# Altium PCB PCB1_MB.PcbDoc
Units mm, origin at the board's own origin, x right, y up, seen from the top; angles counter-clockwise.
Board outline 130 x 98.75 mm, 2 copper layers (Top Layer, Bottom Layer); 30 components, 51 nets, 191 pads, 0 vias.
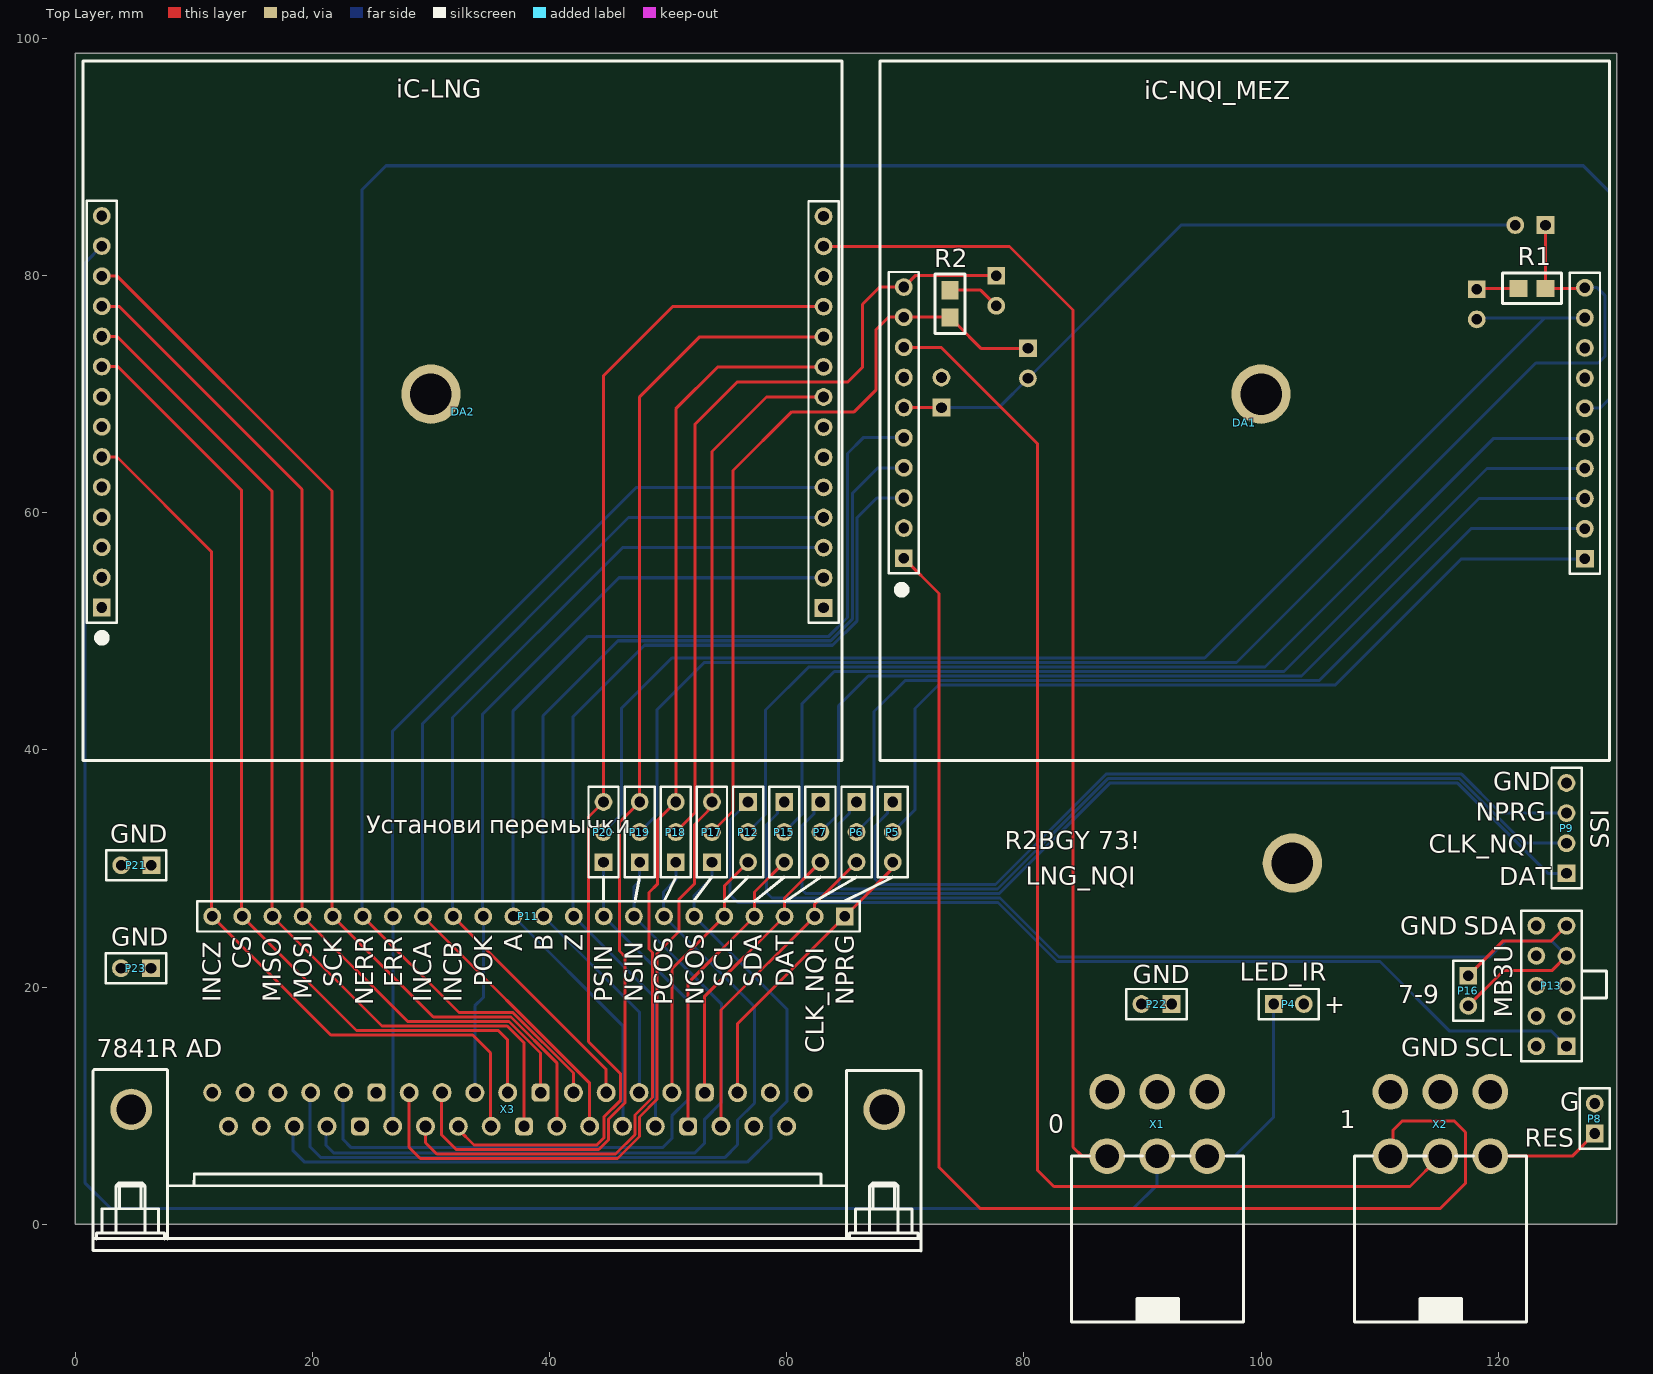
[diagram p0: Top Layer view]
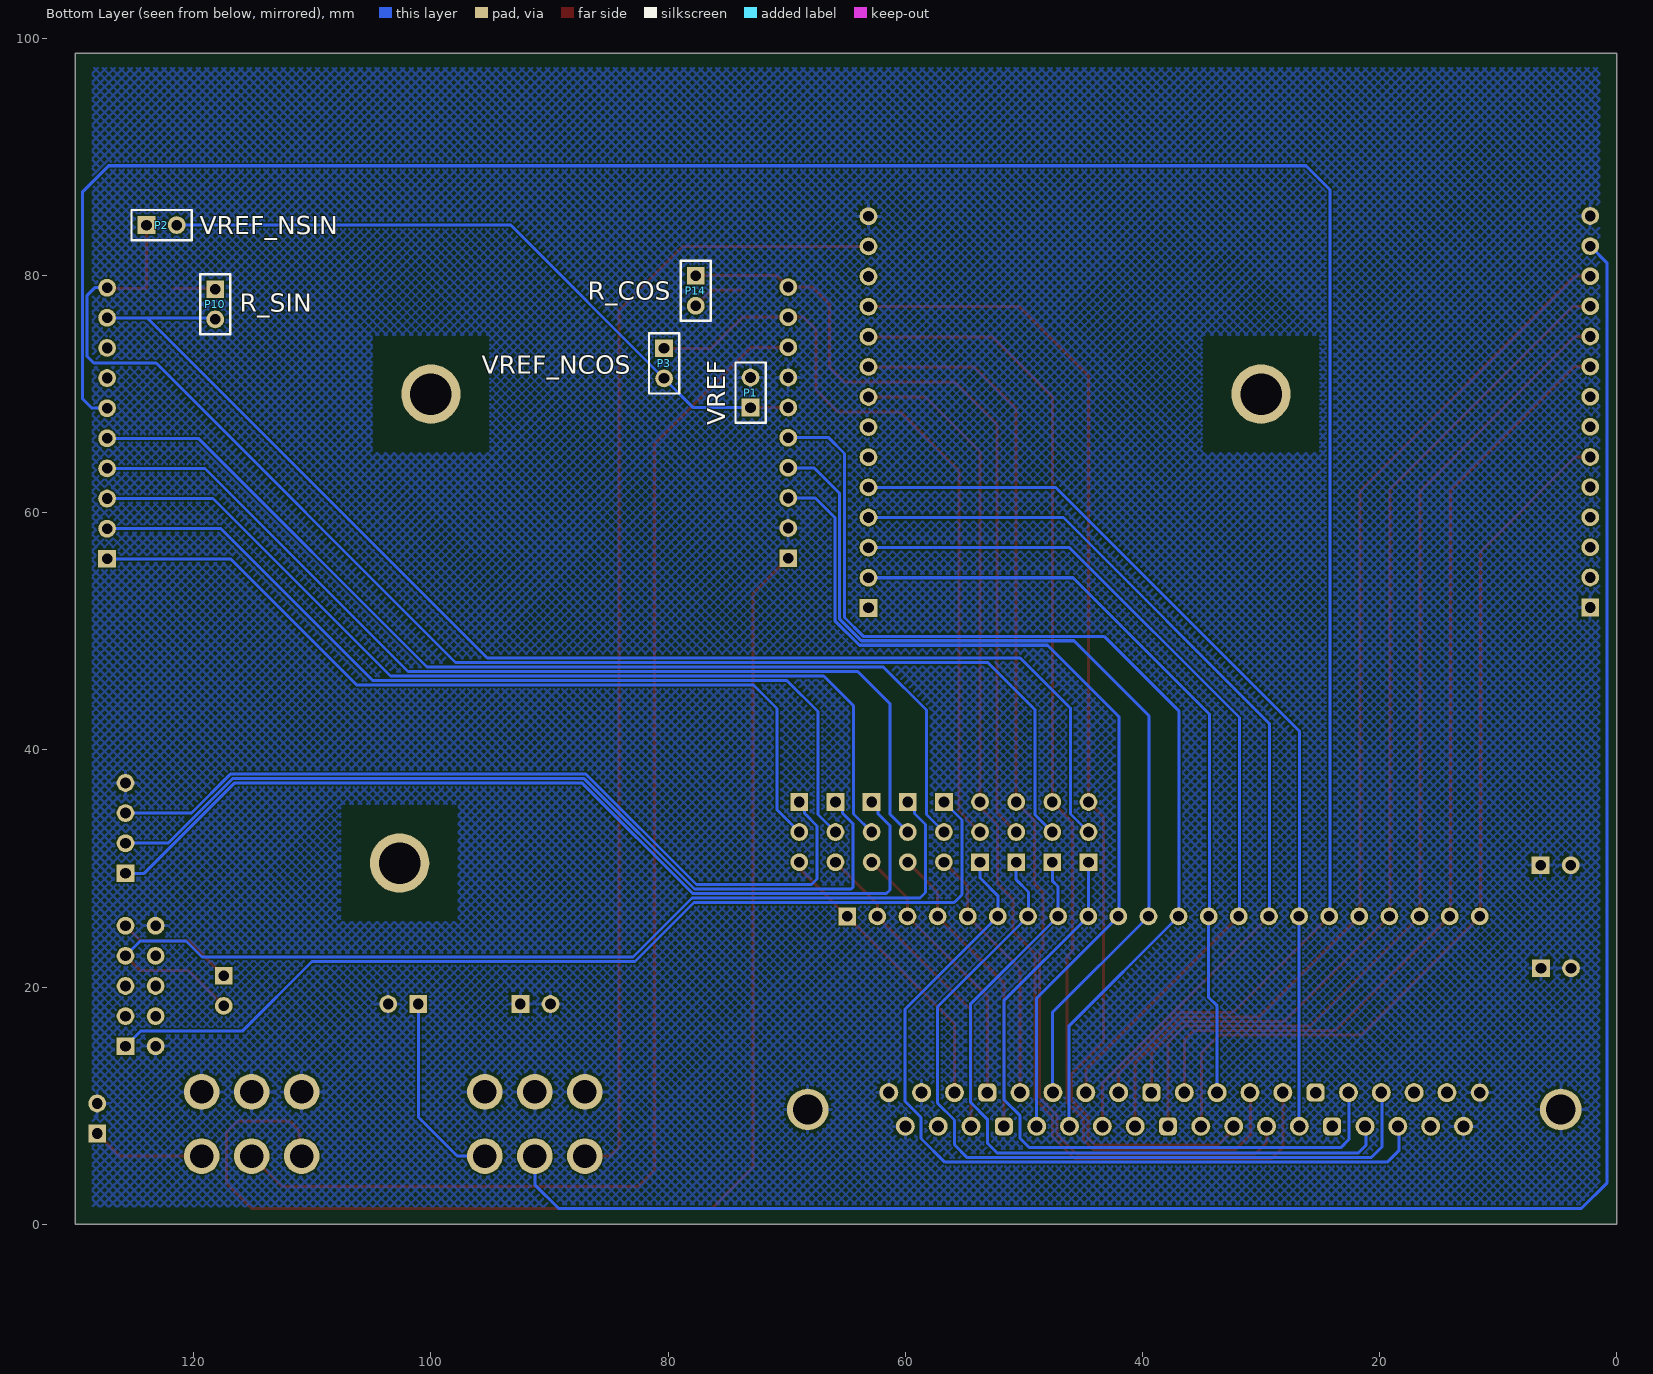
[diagram p1: Bottom Layer view, seen from below]

## Layer stack, top to bottom
Top Solder: solder mask 0.0102, Solder Resist, Dk 3.5
Top Layer: signal copper 0.0356
Dielectric 1: dielectric 0.32, FR-4, Dk 4.8
Bottom Layer: signal copper 0.0356
Bottom Solder: solder mask 0.0102, Solder Resist, Dk 3.5

## Board outline
0,0 0,98.75 130,98.75 130,0

## Design rules (kind name [scope] priority, off if disabled: settings)
Clearance [All] p1: gap=0.125 ignorepadtopadclearanceinfootprint=FALSE
PolygonConnect [All] p1: connectstyle=Relief reliefconductorwidth=0.254 reliefentries=4 polygonreliefangle="90 Angle" airgapwidth=0.254
RoutingVias [All] p1: holewidth=0.711 width=1.27 viastyle="Through Hole" minholewidth=0.711 minwidth=1.27 maxholewidth=0.711 maxwidth=1.27
SolderMaskExpansion [All] p1: expansion=0.102 istentingtop=FALSE
Width [All] p1: maxlimit=0.254 minlimit=0.125 preferedwidth=0.254
30 further rules are at their usual default settings.

## Components (designator, comment, footprint, x,y, rotation, side; value= is the part's Value field where it differs from the comment)
DA1 "iC-NQI_MEZ" iC-NQI_MEZ 69.877,56.165 r0 top
DA2 "iC-LNG" iC_LNG_MEZON 2.25,52 r0 top
P1 "VREF" HDR1X2 73.05,68.859 r90 bottom
P2 "VREF_NSIN" HDR1X2 123.977,84.252 r180 bottom
P3 "VREF_NCOS" HDR1X2 80.34,73.863 r270 bottom
P4 "LED_IR" HDR1X2 101.067,18.567 r0 top
P5 "NPRG" HDR1X3 68.936,35.611 r270 top
P6 "CLK_NQI" HDR1X3 65.888,35.611 r270 top
P7 "DAT" HDR1X3 62.84,35.611 r270 top
P8 "RES" HDR1X2 128.143,7.645 r90 top
P9 "SSI" HDR1X4 125.755,29.591 r90 top
P10 "R_SIN" HDR1X2 118.186,78.842 r270 bottom
P11 "Header 22" HDR1X22 64.897,25.959 r180 top
P12 "SCL" HDR1X3 56.744,35.611 r270 top
P13 "MB3U" HDR2X5 125.755,15.011 r90 top
P14 "R_COS" HDR1X2 77.673,79.985 r270 bottom
P15 "SDA" HDR1X3 59.792,35.611 r270 top
P16 "7-9" HDR1X2 117.475,20.955 r270 top
P17 "NCOS" HDR1X3 53.696,30.531 r90 top
P18 "PCOS" HDR1X3 50.648,30.531 r90 top
P19 "NSIN" HDR1X3 47.6,30.531 r90 top
P20 "PSIN" HDR1X3 44.552,30.531 r90 top
P21 "GND" HDR1X2 6.426,30.277 r180 top
P22 "GND" HDR1X2 92.456,18.567 r180 top
P23 "GND" HDR1X2 6.401,21.59 r180 top
R1 "120" RES 120.371,80.162 r270 top
R2 "120" RES 72.517,75.133 r0 top
X1 "0" POWER 87.022,5.742 r180 top
X2 "1" POWER 110.898,5.742 r180 top
X3 "7841R AD" CHEAP_CONN_FEMALE 68.226,9.679 r180 top

## Footprints (in the part's own frame and the unit in brackets; to place one, negate y for a bottom-side part, rotate by r counter-clockwise, add the part's x,y. Pads: shape width x height; smd on the part's side, far side on the other; paste and mask are expansions set on the pad)
CHEAP_CONN_FEMALE [mm] "CHEAP_CONN_FEMALE"
  round 1.6 hole 1: 1(6.833,-1.422) 2(9.601,-1.422) 3(12.37,-1.422) 5(17.907,-1.422) 6(20.676,-1.422) 7(23.444,-1.422) 8(26.213,-1.422) 10(31.75,-1.422) 11(34.519,-1.422) 12(37.287,-1.422) 13(40.056,-1.422) 15(45.593,-1.422) 16(48.362,-1.422) 17(51.13,-1.422) 18(53.899,-1.422) 20(8.23,1.422) 21(10.998,1.422) 22(13.767,1.422) 24(19.304,1.422) 25(22.073,1.422) 26(24.841,1.422) 27(27.61,1.422) 29(33.147,1.422) 30(35.916,1.422) 31(38.684,1.422) 32(41.453,1.422) 34(46.99,1.422) 35(49.759,1.422) 36(52.527,1.422) 37(55.296,1.422)
  rrect50% 1.524x1.524 hole 0.965: 4(15.138,-1.422) 9(28.981,-1.422) 14(42.824,-1.422) 23(16.535,1.422) 28(30.378,1.422) 33(44.221,1.422)
  round 1.524 hole 0.965: 19(56.667,-1.422)
  round 3.5 hole 2.5: 38(0,0) 39(63.5,0)
  silkscreen extent -3.11,-3.36 66.72,11.92
HDR1X2 [mm] "Connector; Header; 2 Position"
  rect 1.5x1.5 hole 0.9: 1(0,0)
  round 1.5 hole 0.9: 2(2.54,0)
  silkscreen extent -1.27,-1.27 3.81,1.27
HDR1X3 [mm] "Connector; Header; 3 Position"
  rect 1.5x1.5 hole 0.9: 1(0,0)
  round 1.5 hole 0.9: 2(2.54,0) 3(5.08,0)
  silkscreen extent -1.27,-1.27 6.35,1.27
HDR1X4 [mm] "Connector; Header; 4 Position"
  rect 1.5x1.5 hole 0.9: 1(0,0)
  round 1.5 hole 0.9: 2(2.54,0) 3(5.08,0) 4(7.62,0)
  silkscreen extent -1.27,-1.27 8.89,1.27
HDR1X22 [mm] "Connector; Header; 22 Position"
  rect 1.5x1.5 hole 0.9: 1(0,0)
  round 1.5 hole 0.9: 2(2.54,0) 3(5.08,0) 4(7.62,0) 5(10.16,0) 6(12.7,0) 7(15.24,0) 8(17.78,0) 9(20.32,0) 10(22.86,0) 11(25.4,0) 12(27.94,0) 13(30.48,0) 14(33.02,0) 15(35.56,0) 16(38.1,0) 17(40.64,0) 18(43.18,0) 19(45.72,0) 20(48.26,0) 21(50.8,0) 22(53.34,0)
  silkscreen extent -1.27,-1.27 54.61,1.27
HDR2X5 [mm] "Connector; Header; 5x2 Position"
  rect 1.5x1.5 hole 0.9: 1(0,0)
  round 1.5 hole 0.9: 2(0,2.54) 3(2.54,0) 4(2.54,2.54) 5(5.08,0) 6(5.08,2.54) 7(7.62,0) 8(7.62,2.54) 9(10.16,0) 10(10.16,2.54)
  silkscreen extent -1.27,-1.27 11.43,3.81
iC-NQI_MEZ [mm]
  rect 1.5x1.5 hole 0.9: 1(0,0) 20(57.429,-0.051)
  round 1.5 hole 0.9: 2(0,2.54) 3(0,5.08) 4(0,7.62) 5(0,10.16) 6(0,12.7) 7(0,15.24) 8(0,17.78) 9(0,20.32) 10(0,22.86) 11(57.429,22.809) 12(57.429,20.269) 13(57.429,17.729) 14(57.429,15.189) 15(57.429,12.649) 16(57.429,10.109) 17(57.429,7.569) 18(57.429,5.029) 19(57.429,2.489)
  silkscreen extent -2.01,-17.08 59.49,41.92
iC_LNG_MEZON [mm]
  rect 1.5x1.5 hole 0.9: 1(0,0) 28(60.858,-0.025)
  round 1.5 hole 0.9: 2(0,2.54) 3(0,5.08) 4(0,7.62) 5(0,10.16) 6(0,12.7) 7(0,15.24) 8(0,17.78) 9(0,20.32) 10(0,22.86) 11(0,25.4) 12(0,27.94) 13(0,30.48) 14(0,33.02) 15(60.858,32.995) 16(60.858,30.455) 17(60.858,27.915) 18(60.858,25.375) 19(60.858,22.835) 20(60.858,20.295) 21(60.858,17.755) 22(60.858,15.215) 23(60.858,12.675) 24(60.858,10.135) 25(60.858,7.595) 26(60.858,5.055) 27(60.858,2.515)
  silkscreen extent -1.57,-12.91 62.43,46.09
POWER [mm] "POWER"
  round 3 hole 2: 1(0,0) 2(-4.217,0) 3(-8.435,0) 4(0,-5.422) 5(-4.217,-5.422) 6(-8.435,-5.422)
  silkscreen extent -11.5,0 3,14
RES [mil] "FROM_MAX"
  rect 55.98x60 smd: 1(49,52.71) 2(49,142.71)
  silkscreen extent -1,0 99,196, body extent 17,19 81,177, height 100

## Part data
DA1: "Оптический энкодер"
DA2: library part iC-LNG_MEZ, "Оптический энкодер"
P1 P2 P3 P4 P8 P10 P14 P16 P21 P22 P23: library part "Header 2", "Header, 2-Pin", LatestRevisionDate=17-Jul-2002, LatestRevisionNote="Re-released for DXP Platform.", Publisher="Altium Limited"
P5 P6 P7 P12 P15 P17 P18 P19 P20: library part "Header 3", "Header, 3-Pin", LatestRevisionDate=17-Jul-2002, LatestRevisionNote="Re-released for DXP Platform.", Publisher="Altium Limited"
P9: library part "Header 4", "Header, 4-Pin", LatestRevisionDate=17-Jul-2002, LatestRevisionNote="Re-released for DXP Platform.", Publisher="Altium Limited"
P11: "Header, 22-Pin", LatestRevisionDate=17-Jul-2002, LatestRevisionNote="Re-released for DXP Platform.", Publisher="Altium Limited"
P13: library part "Header 5X2", "Header, 5-Pin, Dual row", LatestRevisionDate=17-Jul-2002, LatestRevisionNote="Re-released for DXP Platform.", Publisher="Altium Limited"
R1 R2: library part RES
X1 X2: library part POWER
X3: library part CHEAP_CON_37_FEM_7841R_AD

## Free pads (board coordinates)
  round 5 hole 3.5: 0(30,70) 0(100,70) 0(102.641,30.455)

## Nets (pads, with @x,y where several pads share a name; then routed paths per layer and width w, separated by ;. In a path a pad name is that pad's centre, name@x,y a point inside that pad or via, vN(x,y) a via of type N, cw(c..) or ccw(c..) an arc to the next point about the centre after c; other vN are vias at no path point)
A: DA1.5 P11.12 X3.25 | length 89.5
  Bottom Layer w0.254: X3.25@46.177,8.257 46.177,16.739 P11.12 36.906,26.01 36.906,43.256 43.231,49.581 63.551,49.581 65.126,51.156 65.126,64.999 66.452,66.325 DA1.5
B: DA1.4 P11.11 X3.6 | length 80.4
  Bottom Layer w0.254: X3.6@47.6,11.101 47.6,17.856 P11.11 39.446,26.01 39.446,42.875 45.773,49.202 63.708,49.202 65.532,51.026 65.532,61.62 67.697,63.785 DA1.4
CLK_NQI: DA1.19 P6.2 | length 77.1
  Bottom Layer w0.254: P6.2 67.361,34.544 67.361,43.231 69.987,45.857 73.838,45.857 104.912,45.857 117.709,58.654 DA1.19
CLK_NQI_1: P6.3 P11.2 X3.22 | length 27.3
  Top Layer w0.254: X3.22@54.459,8.097 54.459,18.061 P11.2 62.357,27 P6.3
  Bottom Layer w0.254: P11.2 P11.2@62.385,25.987 ; P6.3@65.888,30.443 P6.3
CS: DA2.9 P11.21 X3.10 | length 83.2
  Top Layer w0.254: DA2.9 3.601,72.32 14.046,61.874 14.046,26.01 P11.21 23.716,16.34 35.679,16.34 36.474,15.545 X3.10@36.474,11.101
DAT: DA1.18 P7.2 | length 81.5
  Bottom Layer w0.254: P7.2 64.364,34.595 64.364,43.713 66.886,46.236 73.838,46.236 103.411,46.236 118.37,61.194 DA1.18
DAT_1: P7.3 P11.3 X3.4 | length 23.7
  Top Layer w0.254: X3.4@53.088,10.902 53.088,19.229 P11.3 59.817,27.508 P7.3
ERR: DA2.24 P11.16 X3.32 | length 78.2
  Bottom Layer w0.254: X3.32@26.797,8.257 P11.16 26.746,26.01 26.746,41.554 47.326,62.135 DA2.24
GND: DA1.2 DA1.7 DA2.1 DA2.14 DA2.15 P1.2 P4.2 P8.2 P9.4 P13.2 P13.10 P21.1 P21.2 P22.1 P22.2 P23.1 P23.2 X1.4 X1.5 X1.6 X2.4 X2.5 X2.6 X3.1 X3.2 X3.19 X3.20 X3.37 X3.38 X3.39
INCA: DA2.25 P11.15 X3.26 | length 81
  Top Layer w0.254: P11.15 43.358,11.938 X3.26@43.358,8.052
  Bottom Layer w0.254: P11.15 29.286,26.01 29.286,42.215 46.666,59.595 DA2.25
INCB: DA2.26 P11.14 X3.7 | length 74.3
  Top Layer w0.254: P11.14 44.782,13.054 X3.7@44.782,10.992
  Bottom Layer w0.254: P11.14 31.826,26.01 31.826,42.723 46.158,57.055 DA2.26
INCZ: DA2.6 P11.22 X3.29 | length 77.8
  Top Layer w0.254: DA2.6 3.524,64.7 11.506,56.718 11.506,26.01 P11.22 21.555,15.961 33.518,15.961 35.027,14.453 X3.29@35.027,8.257
LED_IR: P4.1 X1.3 | length 16.5
  Bottom Layer w0.254: X1.3 97.766,5.742 101.067,9.042 P4.1
MISO: DA2.10 P11.20 X3.28 | length 88.4
  Top Layer w0.254: DA2.10 3.55,74.86 16.586,61.824 16.586,26.01 P11.20 25.877,16.719 36.433,16.719 37.848,15.304 X3.28@37.848,8.138
MOSI: DA2.11 P11.19 X3.9 | length 87.6
  Top Layer w0.254: DA2.11 3.702,77.4 19.126,61.976 19.126,26.01 P11.19 28.038,17.098 36.59,17.098 39.245,14.443 X3.9@39.245,10.965
NCOS: DA2.21 P17.3 X3.13 | length 96.8
  Top Layer w0.254: X3.13 28.143,11.074 28.143,6.502 29.102,5.543 45.729,5.543 47.584,7.399 47.584,9.05 49.071,10.536 49.071,22.833 50.927,24.689 50.927,27.407 52.222,28.702 52.222,33.706 53.366,34.849 53.366,34.944 53.696,35.274 P17.3 53.696,65.151 58.299,69.755 DA2.21
NCOS_NQI: DA1.9 P3.1 P17.2 R2.1 | length 65.5
  Top Layer w0.254: P17.2 55.474,34.849 55.474,63.551 60.427,68.504 65.684,68.504 67.513,70.333 67.513,75.413 68.586,76.485 DA1.9 73.749,76.485 73.749,76.434 74.346,75.837 74.397,75.837 76.37,73.863 P3.1
NCOS_NQI_1: P11.6 P17.1 X3.35 | length 71.3
  Bottom Layer w0.254: X3.35@18.39,8.257 18.39,6.198 19.351,5.236 56.671,5.236 58.674,7.239 58.674,9.017 60.02,10.363 60.02,18.136 P11.6 52.197,27.711 53.696,29.21 P17.1
NERR: DA1.15 P11.17 X3.8 | length 213
  Top Layer w0.254: P11.17 32.36,17.856 36.904,17.856 42.013,12.747 X3.8@42.013,11.032
  Bottom Layer w0.254: P11.17 24.206,26.01 24.206,87.249 26.213,89.256 127.178,89.256 129.362,87.071 129.362,69.596 128.58,68.814 DA1.15
NetP5_1: P5.1 P9.3 | length 70.8
  Bottom Layer w0.254: P5.1 68.487,35.162 68.487,34.629 67.437,33.579 67.437,29.108 67.902,28.643 77.614,28.643 86.919,37.948 116.916,37.948 120.193,34.671 P9.3@125.679,34.671
NetP6_1: P6.1 P9.2 | length 75.2
  Bottom Layer w0.254: P6.1 65.3,35.023 65.3,34.668 64.414,33.782 64.414,28.413 64.563,28.264 77.771,28.264 87.076,37.569 116.736,37.569 122.174,32.131 P9.2@125.679,32.131
NetP7_1: P7.1 P9.1 | length 79.6
  Bottom Layer w0.254: P7.1 62.315,35.086 62.315,34.629 61.29,33.604 61.29,28.194 61.599,27.885 77.928,27.885 87.233,37.19 116.579,37.19 124.178,29.591 P9.1@125.679,29.591
NetP10_1: P10.1 R1.1 | length 3.6
  Top Layer w0.254: P10.1 118.262,78.918 R1.1
NetP12_1: P12.1 P13.1 | length 84.3
  Bottom Layer w0.254: P12.1 55.22,34.087 55.22,27.788 55.88,27.127 77.823,27.127 82.799,22.151 110.031,22.151 115.9,16.281 124.485,16.281 P13.1
NetP13_7: P13.7 P15.1 P16.2 | length 89.1
  Top Layer w0.254: P16.2 120.447,21.387 124.511,21.387 P13.7
  Bottom Layer w0.254: P15.1 59.229,35.049 59.229,34.642 58.293,33.706 58.293,27.965 58.752,27.506 77.98,27.506 82.956,22.53 119.304,22.53 120.65,23.876 124.511,23.876 P13.7
NetP13_9: P13.9 P16.1 | length 10
  Top Layer w0.254: P16.1 120.421,23.901 124.485,23.901 P13.9
NetP14_2: P14.2 R2.2 | length 4.5
  Top Layer w0.254: R2.2 76.36,78.758 P14.2
NPRG: DA1.20 P5.2 | length 72.9
  Bottom Layer w0.254: P5.2 70.815,34.95 70.815,43.485 72.808,45.478 73.838,45.478 106.26,45.478 116.896,56.114 DA1.20
NPRG_1: P5.3 P11.1 X3.3 | length 25.1
  Top Layer w0.254: X3.3@55.856,10.885 55.856,16.918 P11.1 68.697,29.759 68.697,30.292 P5.3
NSIN: DA2.19 P19.3 X3.12 | length 100.2
  Top Layer w0.254: X3.12@30.886,11.101 30.886,7.544 32.129,6.301 44.15,6.301 44.958,7.109 44.958,8.839 46.38,10.262 46.38,22.555 45.898,23.038 45.898,33.909 P19.3 47.6,69.774 52.66,74.835 DA2.19
NSIN_NQI: DA1.11 P2.1 P19.2 R1.2 | length 119
  Top Layer w0.254: P2.1 123.977,78.936 R1.2 127.25,78.918 DA1.11
  Bottom Layer w0.254: P19.2 49.073,34.544 49.073,43.409 53.037,47.373 73.838,47.373 97.919,47.373 123.165,72.619 128.422,72.619 128.983,73.179 128.983,78.332 128.341,78.974 DA1.11
NSIN_NQI_1: P11.8 P19.1 X3.34 | length 61.7
  Bottom Layer w0.254: X3.34@21.158,8.257 21.158,6.655 21.819,5.994 52.222,5.994 53.086,6.858 53.086,8.865 54.483,10.262 54.483,18.593 P11.8 47.117,28.473 47.6,28.956 P19.1
PCOS: DA2.20 P18.3 X3.31 | length 96.9
  Top Layer w0.254: X3.31 29.542,6.882 30.501,5.922 45.572,5.922 47.205,7.556 47.205,9.207 48.692,10.693 48.692,22.911 48.387,23.216 48.387,27.965 49.124,28.702 49.124,34.087 P18.3 50.648,68.758 54.184,72.295 DA2.20
PCOS_NQI: DA1.10 P14.1 P18.2 | length 68.8
  Top Layer w0.254: P18.2 52.273,34.696 52.273,67.462 55.829,71.018 65.151,71.018 66.396,72.263 66.396,77.572 67.849,79.025 DA1.10 70.837,79.985 P14.1
PCOS_NQI_1: P11.7 P18.1 X3.16 | length 69.5
  Bottom Layer w0.254: X3.16@19.812,11.101 19.812,6.528 20.724,5.615 54.764,5.615 55.855,6.706 55.855,8.788 57.277,10.211 57.277,18.339 P11.7 49.606,26.01 49.606,28.016 50.648,29.058 P18.1
POK: DA2.27 P11.13 X3.11 | length 65.7
  Bottom Layer w0.254: X3.11@33.706,11.101 33.706,18.415 34.417,19.126 P11.13 34.366,26.01 34.366,43.028 45.853,54.515 DA2.27
PSIN: DA2.18 P20.3 X3.30 | length 100.8
  Top Layer w0.254: X3.30 32.31,7.999 33.63,6.68 43.993,6.68 44.577,7.264 44.577,9.042 46.001,10.467 46.001,12.673 43.282,15.392 43.282,34.341 P20.3 44.552,71.552 50.374,77.375 DA2.18
PSIN_NQI: DA1.12 P10.2 P20.2 | length 111.7
  Bottom Layer w0.254: P20.2 46.076,34.595 46.076,43.51 50.317,47.752 73.838,47.752 95.25,47.752 123.932,76.434 ; P10.2 118.319,76.434 123.932,76.434 ; DA1.12 123.932,76.434
PSIN_NQI_1: P11.9 P20.1 X3.15 | length 59.1
  Bottom Layer w0.254: X3.15@22.606,11.101 22.606,7.137 23.292,6.452 49.53,6.452 50.317,7.239 50.317,9.144 51.689,10.516 51.689,18.847 P11.9 44.552,25.984 P20.1
RESERVE: P8.1 X2.3 | length 9.6
  Top Layer w0.254: X2.3 126.24,5.742 P8.1
SCK: DA2.12 P11.18 X3.27 | length 92.3
  Top Layer w0.254: DA2.12 3.55,79.94 21.666,61.824 21.666,26.01 P11.18 30.199,17.477 36.747,17.477 40.616,13.608 X3.27@40.616,8.139
SCL: DA1.16 P12.2 | length 89.5
  Bottom Layer w0.254: P12.2 58.217,34.544 58.217,43.358 61.853,46.994 73.838,46.994 100.334,46.994 119.614,66.274 DA1.16
SCL_1: P11.5 P12.3 X3.5 | length 22.2
  Top Layer w0.254: X3.5@50.319,11.01 50.319,21.541 P11.5 54.737,28.524 P12.3
SDA: DA1.17 P15.2 | length 85.7
  Bottom Layer w0.254: P15.2 61.29,34.569 61.29,43.891 64.014,46.615 73.838,46.615 101.936,46.615 119.055,63.734 DA1.17
SDA_1: P11.4 P15.3 X3.23 | length 26
  Top Layer w0.254: X3.23@51.691,7.97 51.691,20.372 P11.4 57.277,28.016 P15.3
  Bottom Layer w0.254: P15.3@59.724,30.463 P15.3
VDD_LNG: DA2.13 X1.2 | length 174.1
  Bottom Layer w0.254: DA2.13 0.813,81.043 0.813,3.505 2.997,1.321 89.23,1.321 91.24,3.33 X1.2
VDD_NQI: DA1.1 X2.1 | length 112.7
  Top Layer w0.254: DA1.1 72.847,53.195 72.847,4.801 76.302,1.346 115.138,1.346 117.246,3.454 117.246,7.747 116.307,8.687 111.887,8.687 111.106,7.906 111.106,5.95 X2.1
VDDA_LNG: DA2.16 X1.1 | length 97
  Top Layer w0.254: DA2.16 78.785,82.455 84.15,77.089 84.15,6.502 84.911,5.742 X1.1
VDDA_NQI: DA1.8 X2.2 | length 111.5
  Top Layer w0.254: DA1.8 73.019,73.945 81.128,65.837 81.128,4.572 82.525,3.175 112.548,3.175 X2.2
VREF_NQI: DA1.6 P1.1 P2.2 P3.2 | length 57.9
  Top Layer w0.254: DA1.6 73.045,68.865 P1.1
  Bottom Layer w0.254: P1.1 77.876,68.859 P3.2 93.269,84.252 P2.2
Z: DA1.3 P11.10 X3.24 | length 78
  Bottom Layer w0.254: X3.24@48.92,8.257 48.92,19.075 P11.10 41.986,26.01 41.986,42.799 48.01,48.823 63.865,48.823 65.938,50.896 65.938,59.588 67.595,61.245 DA1.3
pads on no net: DA1.13 DA1.14 DA2.2 DA2.3 DA2.4 DA2.5 DA2.7 DA2.8 DA2.17 DA2.22 DA2.23 DA2.28 P13.3 P13.4 P13.5 P13.6 P13.8 X3.14 X3.17 X3.18 X3.21 X3.33 X3.36

## Polygon pours and split planes (outlines as drawn)
GND on Bottom Layer "Top Overlay-No Net" (hatched 45Degree grid 0.508 track 0.203, remove dead copper, pour order 0): 1.5,97.5 1.5,1.5 128.5,1.5 128.5,97.5

## Other copper
Bottom Layer:
  pour cut-out: 97.641,35.455 107.641,35.455 107.641,25.455 97.641,25.455
  pour cut-out: 95,75 105,75 105,65 95,65
  pour cut-out: 25,75 35,75 35,65 25,65

## Silkscreen, mask and mechanical layers (free items; w line width, h text height)
Top Overlay:
  lines w0.254: 44.552,27.28 44.552,29.261 ; 47.193,27.229 47.6,29.261 ; 49.708,27.305 50.648,29.261 ; 52.222,27.305 53.696,29.261 ; 54.712,27.229 56.744,29.261 ; 57.277,27.229 59.792,29.261 ; 59.868,27.203 62.84,29.261 ; 62.382,27.229 65.888,29.261 ; 64.897,27.254 68.936,29.261 ; 127.051,19.075 129.108,19.075 129.108,21.361 127.076,21.361
  text "GND" at 119.584,36.602 h1.52
  text "NPRG" at 118.086,34.011 h1.52
  text "Установи перемычки" at 24.544,32.457 h2.52
  text "R2BGY 73!" at 78.406,31.611 h1.52
  text "CLK_NQI" at 114.149,31.344 h1.52
  text "LNG_NQI" at 80.176,28.615 h1.52
  text "DAT" at 120.092,28.575 h1.52
  text "GND" at 111.735,24.409 h1.52
  text "SDA" at 117.094,24.409 h1.52
  text "A" at 37.693,23.038 h1.52 r90
  text "B" at 40.284,23.038 h1.52 r90
  text "Z" at 42.799,23.038 h1.52 r90
  text "CS" at 14.792,21.51 h1.52 r90
  text "POK" at 35.179,20.041 h1.52 r90
  text "SCK" at 22.479,19.99 h1.52 r90
  text "ERR" at 27.584,19.99 h1.52 r90
  text "SCL" at 55.423,19.99 h1.52 r90
  text "SDA" at 57.912,19.99 h1.52 r90
  text "DAT" at 60.604,19.99 h1.52 r90
  text "MOSI" at 19.939,18.975 h1.52 r90
  text "INCZ" at 12.268,18.716 h1.52 r90
  text "MISO" at 17.317,18.716 h1.52 r90
  text "INCA" at 30.023,18.721 h1.52 r90
  text "INCB" at 32.588,18.721 h1.52 r90
  text "PSIN" at 45.288,18.721 h1.52 r90
  text "NSIN" at 47.853,18.721 h1.52 r90
  text "NERR" at 25.12,18.467 h1.52 r90
  text "PCOS" at 50.368,18.467 h1.52 r90
  text "NCOS" at 52.984,18.467 h1.52 r90
  text "NPRG" at 65.659,18.467 h1.52 r90
  text "+" at 105.334,17.806 h1.52
  text "CLK_NQI" at 63.144,14.404 h1.52 r90
  text "GND" at 111.811,14.173 h1.52
  text "SCL" at 117.171,14.173 h1.52
  text "G" at 125.248,9.551 h1.52
Mechanical 1:
  the board outline again, w0.254